# Altium PCB PCB1.PcbDoc
Units mil, origin at the board's own origin, x right, y up, seen from the top; angles counter-clockwise.
Board outline 6000 x 4000 mil, 4 copper layers (Top Layer, Layer 2, Layer 3, Bottom Layer 1), stack 25.09 mil thick; 57 components, 32 nets, 177 pads, 52 vias.
Unrouted connection lines stored in the file: 11.
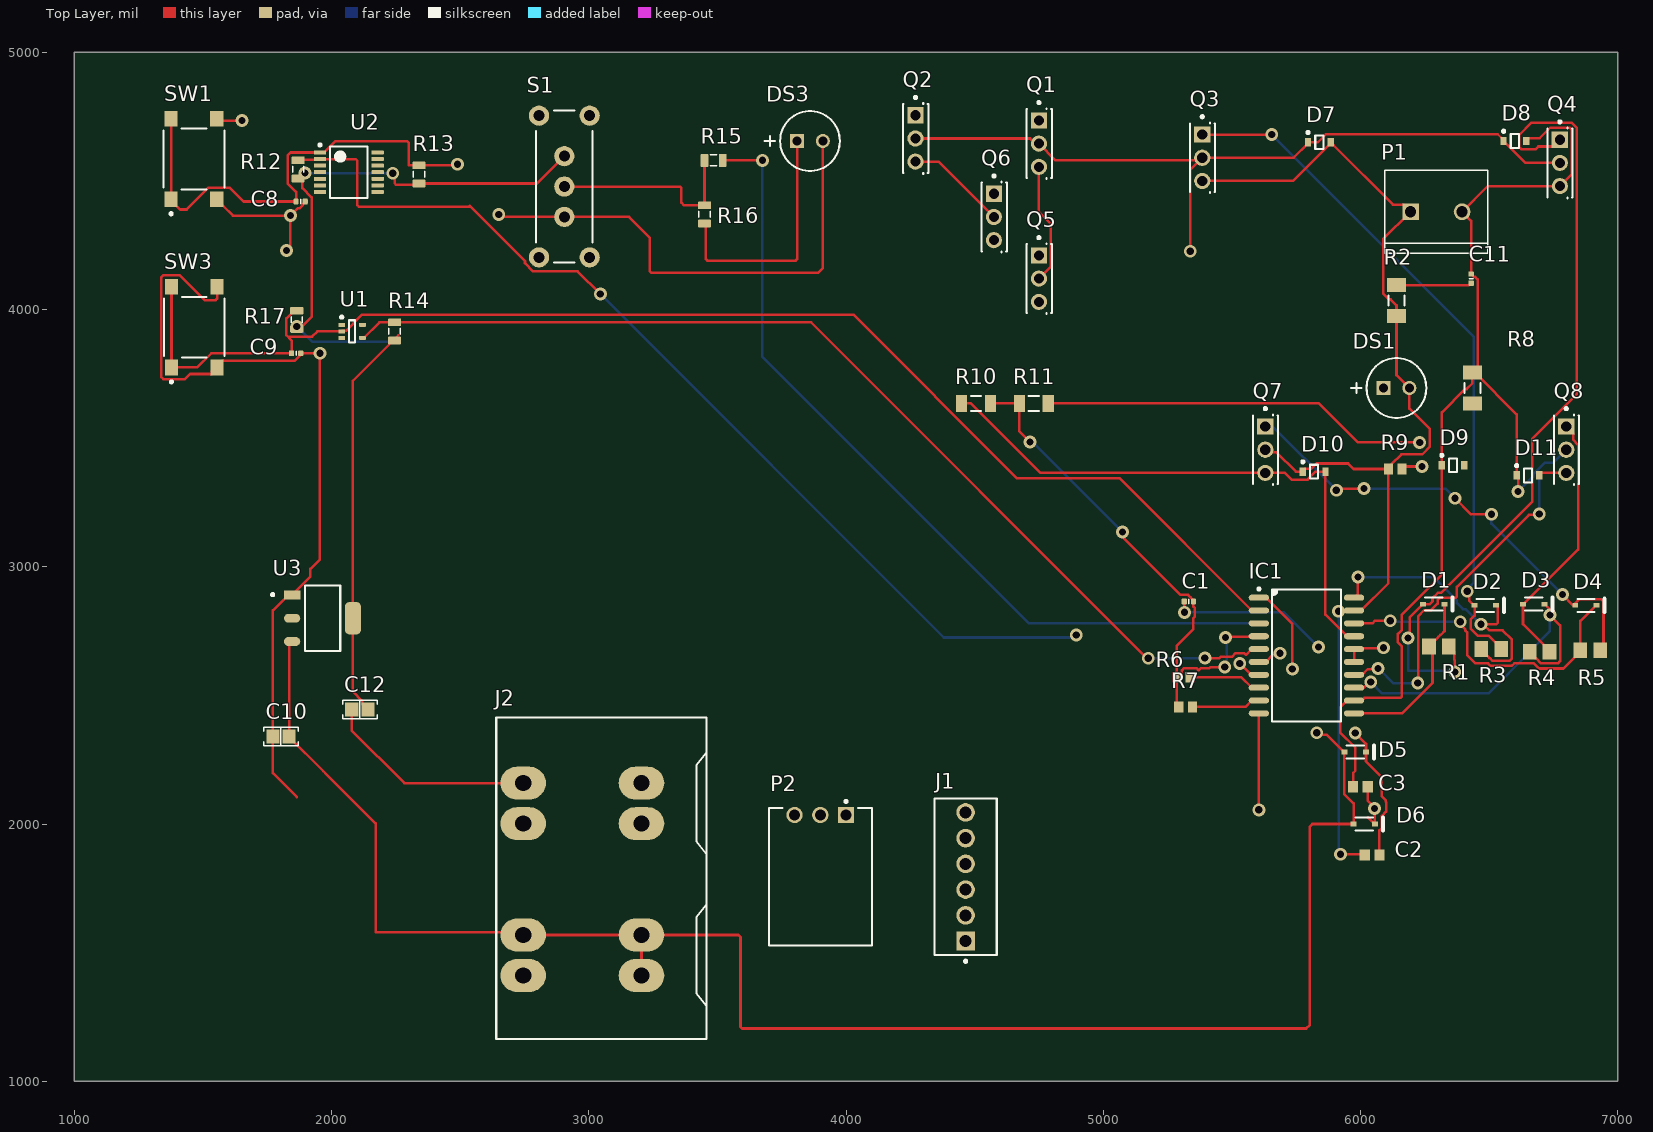
[diagram p0: Top Layer view]
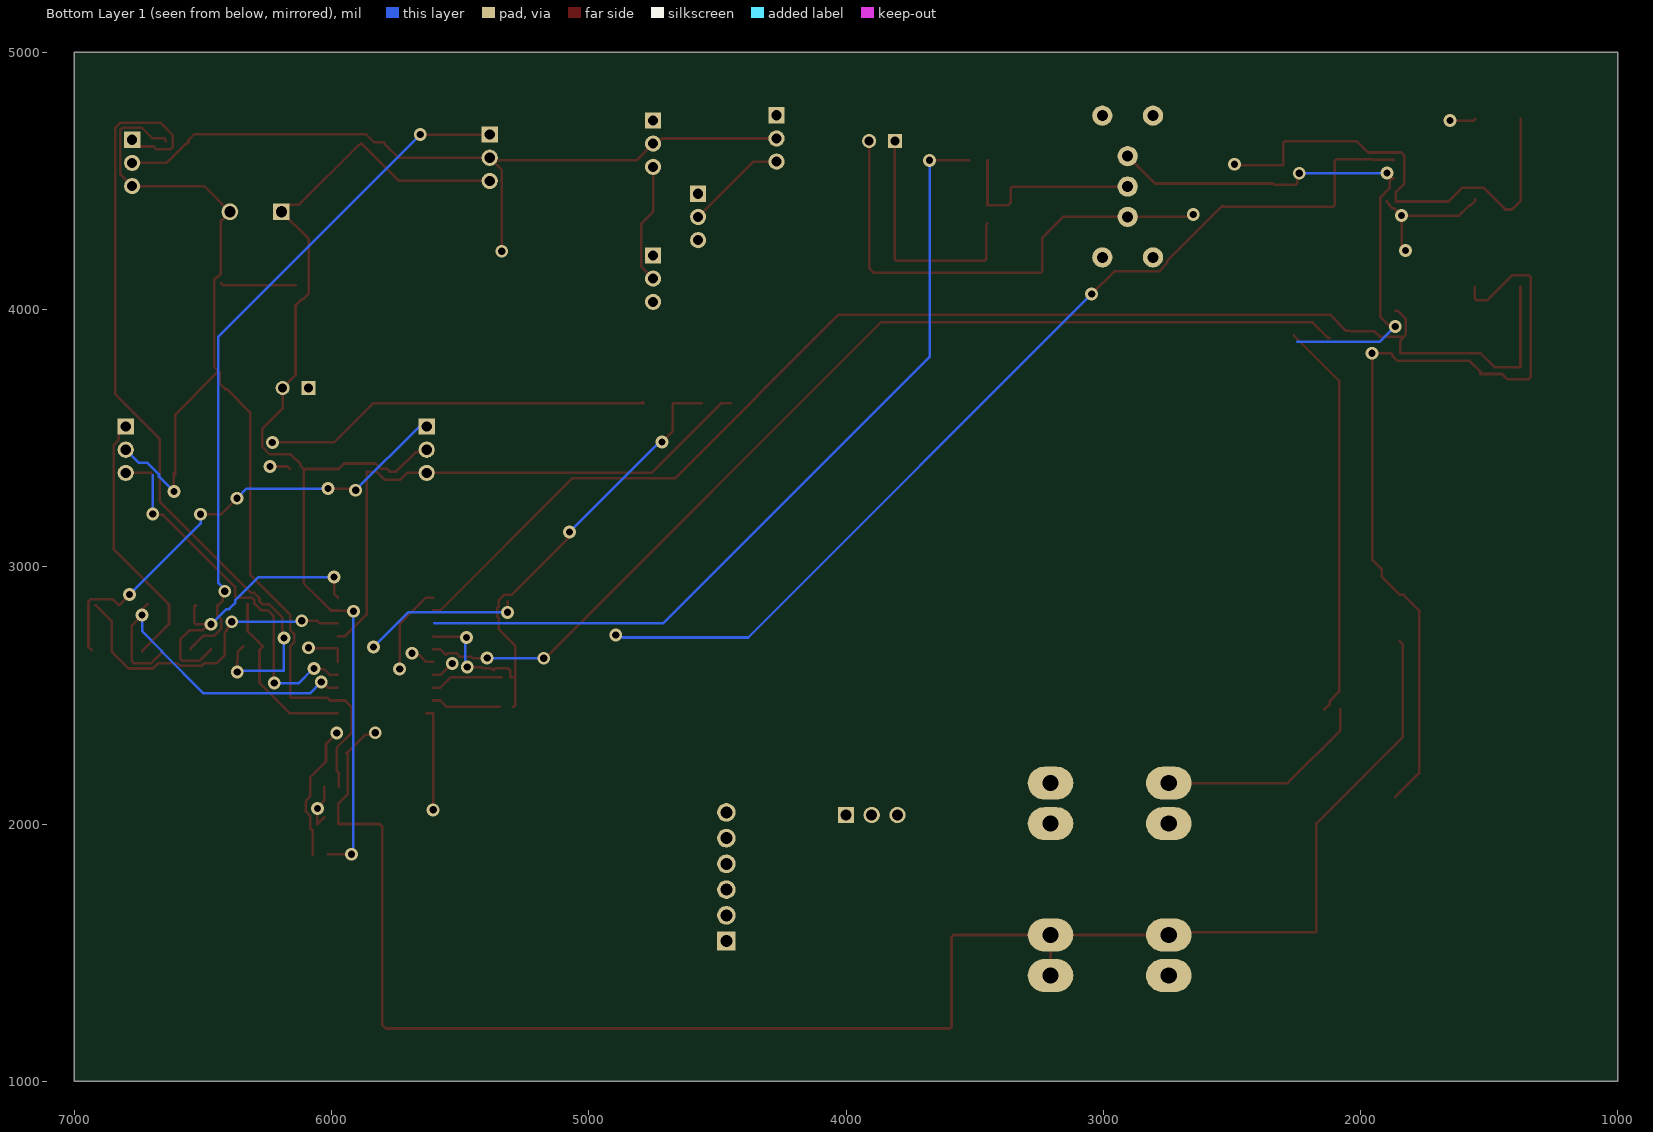
[diagram p1: Bottom Layer 1 view, seen from below]
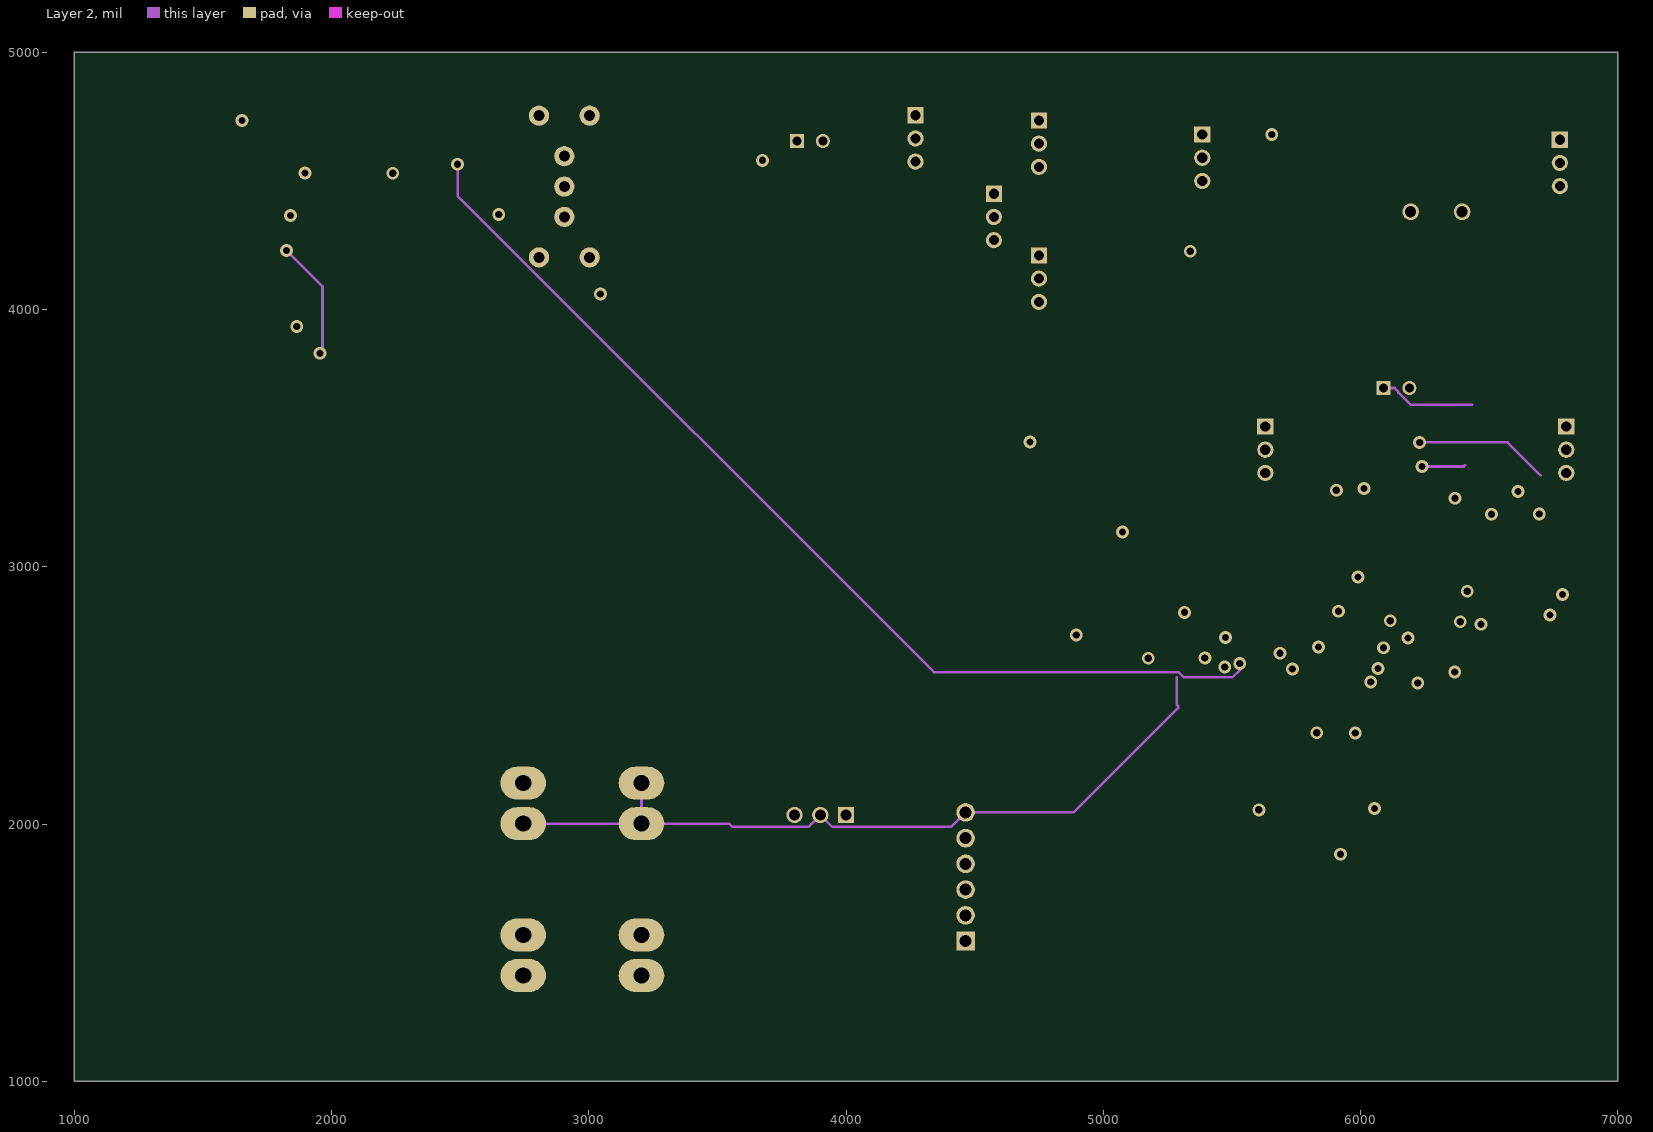
[diagram p2: Layer 2]
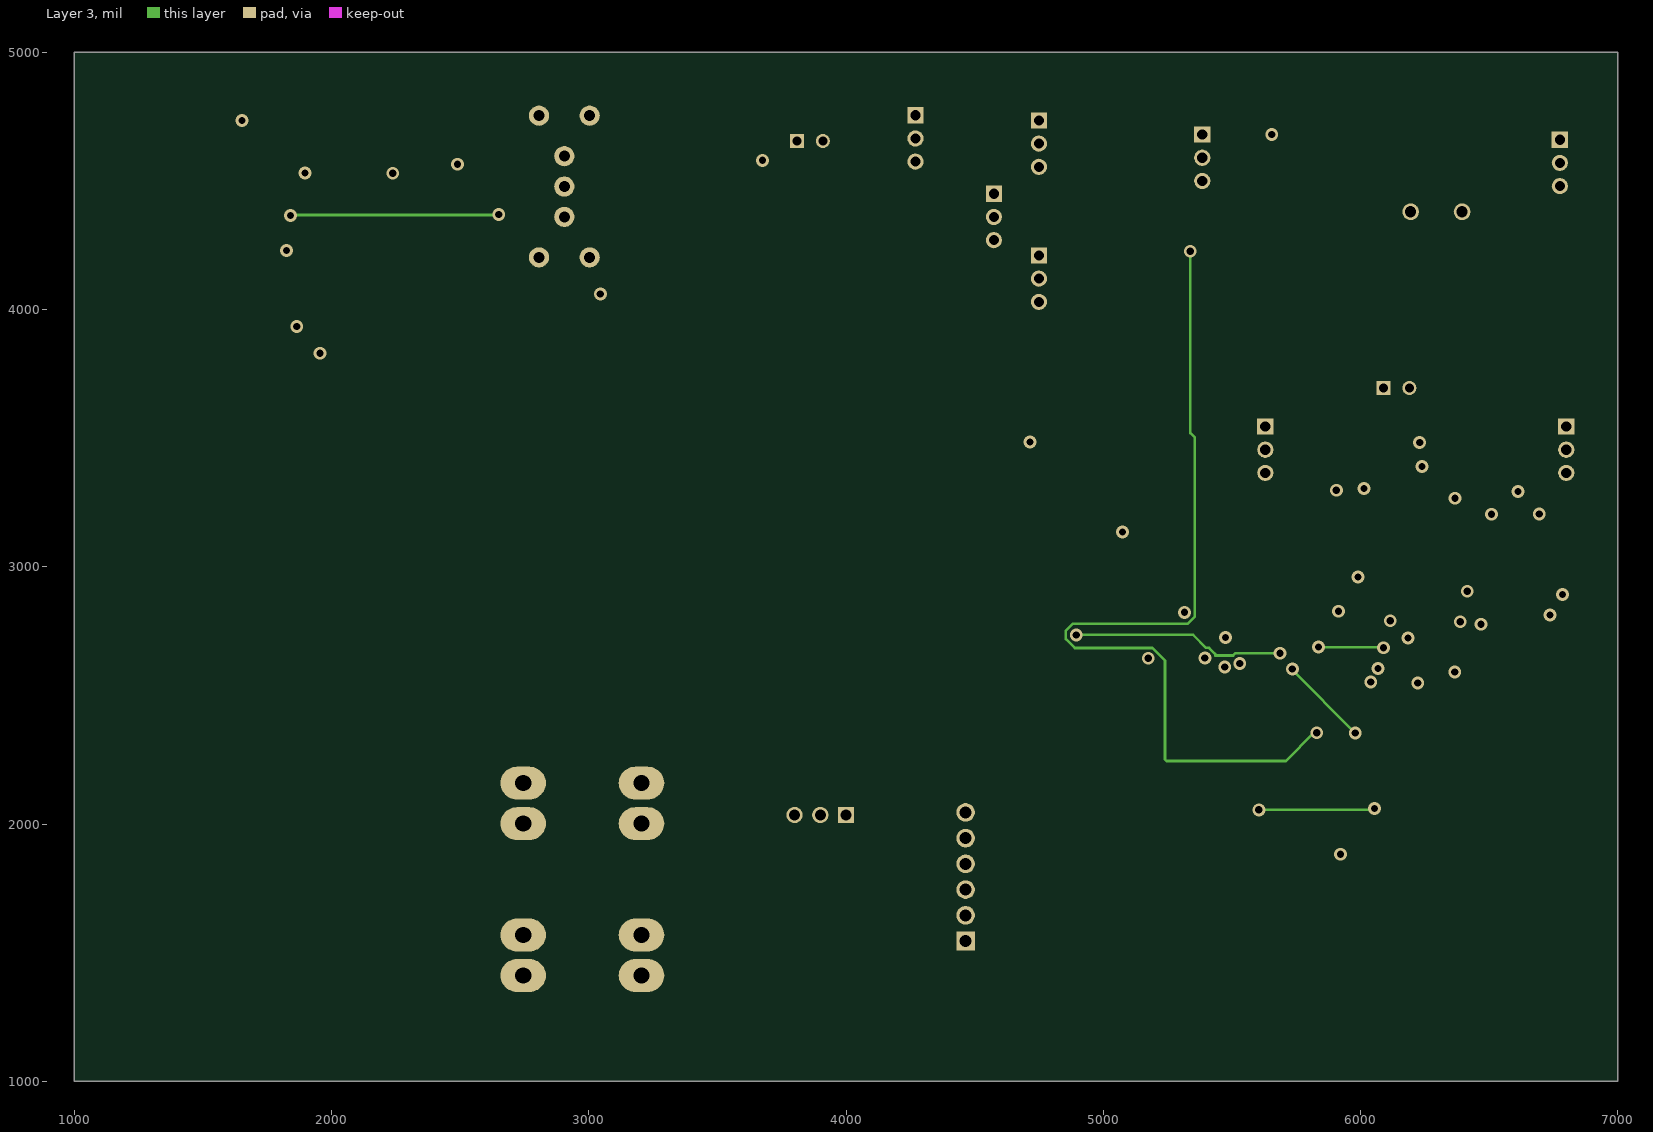
[diagram p3: Layer 3]
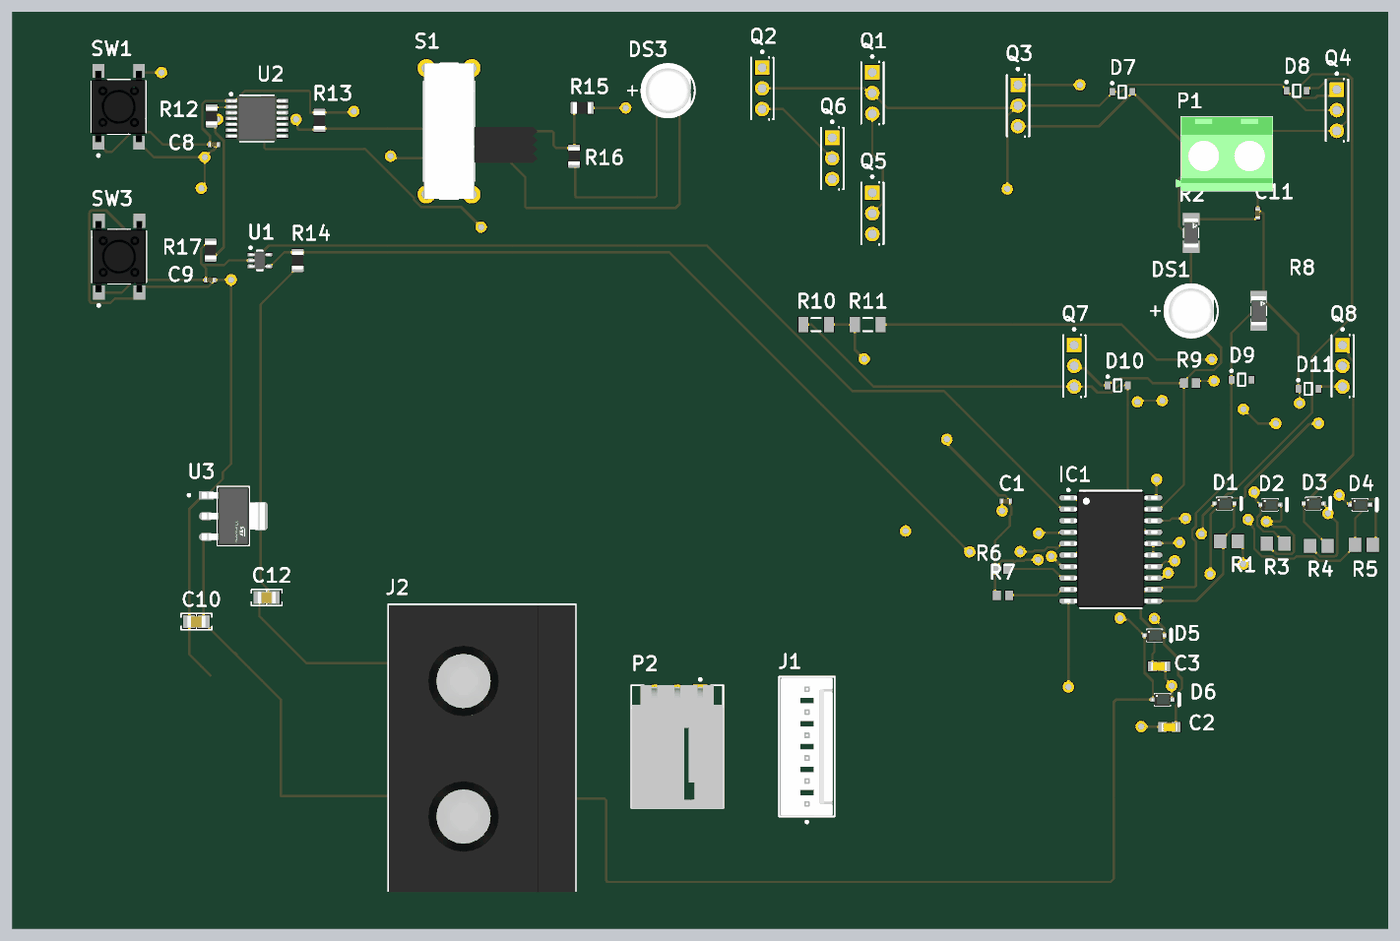
[diagram p4: 3D render of the assembled board from above, using the file's embedded part models]

## Layer stack, top to bottom
Top Solder: solder mask 0.4, Solder Resist, Dk 3.5
Top Layer: signal copper 2.7559
Dielectric 2: prepreg 2.8, PP-006, Dk 4.1
Layer 2: signal copper 0.689
Dielectric 1: dielectric 12.6, FR-4, Dk 4.8
Layer 3: signal copper 0.689
Dielectric 3: prepreg 2.8, PP-006, Dk 4.1
Bottom Layer 1: signal copper 2.7559
Bottom Solder: solder mask 0.4, Solder Resist, Dk 3.5

## Board outline
1000,1000 7000,1000 7000,5000 1000,5000

## Design rules (kind name [scope] priority, off if disabled: settings)
Clearance [All] p1: gap=10 ignorepadtopadclearanceinfootprint=FALSE
PolygonConnect [All] p1: connectstyle=Relief reliefconductorwidth=10 reliefentries=4 polygonreliefangle="90 Angle" airgapwidth=10
RoutingVias [All] p1: holewidth=28 width=50 viastyle="Through Hole" minholewidth=28 minwidth=50 maxholewidth=28 maxwidth=50
SolderMaskExpansion [All] p1: expansion=4 istentingtop=FALSE
Width [All] p1: maxlimit=10 minlimit=10 preferedwidth=10
30 further rules are at their usual default settings.

## Classes and differential pairs
component class U_H-Bridge: C11 D7 D8 D9 D10 D11 DS1 P1 P2 Q1 Q2 Q3 Q4 Q5 Q6 Q7 Q8 R2 R8 R9 R10 R11
component class "U_Gate Driver": C1 C2 C3 D1 D2 D3 D4 D5 D6 IC1 R1 R3 R4 R5 R6 R7
component class U_Control: C8 C9 DS3 J1 R12 R13 R14 R15 R16 R17 S1 SW1 SW3 U1 U2
component class "Motor Driver": C10 C12 J2 U3

## Components (designator, comment, footprint, x,y, rotation, side; value= is the part's Value field where it differs from the comment)
C1 "Capacitor 10µF +/-40% 6.3V 0402" CAPC0402(1005)60_L 5332.72,2865 r0 top value=10µF
C2 "Capacitor 1uF +/- 10% 16V 0603" CAPC1608X90X35ML15T15 6045,1880 r0 top value=1µF
C3 "Capacitor 1uF +/- 10% 16V 0603" CAPC1608X90X35ML15T15 6000,2145 r0 top value=1µF
C8 "Capacitor 100nF +/-20% 10V 0402" CAPC0402(1005)60_L 1880,4420 r0 top value=100nF
C9 "Capacitor 100nF +/-20% 10V 0402" CAPC0402(1005)60_L 1862.72,3830 r0 top value=100nF
C10 "1 µF" "CAP 0805_2012" 1803.5,2340 r0 top
C11 "Capacitor 10µF +/-40% 6.3V 0402" CAPC0402(1005)60_L 6430,4120 r90 top value=10µF
C12 "4.7 µF" "CAP 0805_2012" 2110,2445 r0 top
D1 "1N4148WS-7-F" DIOD-SOD323-2-A_V 6285,2855 r0 top
D2 "1N4148WS-7-F" DIOD-SOD323-2-A_V 6485,2850 r0 top
D3 "1N4148WS-7-F" DIOD-SOD323-2-A_V 6673.46,2855 r0 top
D4 "1N4148WS-7-F" DIOD-SOD323-2-A_V 6876.54,2850 r0 top
D5 "1N4148WS-7-F" DIOD-SOD323-2-A_V 5980,2280 r0 top
D6 "1N4148WS-7-F" DIOD-SOD323-2-A_V 6015,2000 r0 top
D7 "BAT54HT1G" ONSC-SOD-323-2-477-02_V 5840,4650 r0 top
D8 "BAT54HT1G" ONSC-SOD-323-2-477-02_V 6600,4655 r0 top
D9 "BAT54HT1G" ONSC-SOD-323-2-477-02_V 6360,3395 r0 top
D10 "BAT54HT1G" ONSC-SOD-323-2-477-02_V 5820,3370 r0 top
D11 "BAT54HT1G" ONSC-SOD-323-2-477-02_V 6651.1,3355 r0 top
DS1 "WP7113SGD" KING-WP7113SGD_V 6140,3695 r0 top
DS3 "WP7113SGD" KING-WP7113SGD_V 3860,4655 r0 top
IC1 "HIP4081AIBZ" "INTERSIL SOIC-20 WIDE" 5789.96,2655 r0 top
J1 "22-27-2061" FP-22-27-2061-MFG 4465,1795 r90 top
J2 "0399200302" "MOLEX 0399200302" 2975,1785 r90 top
P1 "282837-2" TE_282837-2 6295,4380 r0 top
P2 "70553-0002" MOLX-70553-0002_V 3900,2035 r0 top
Q1 "FQU13N06LTU" FAIR-TO-251-3 4750,4644.84 r0 top
Q2 "FQU13N06LTU" FAIR-TO-251-3 4270,4665 r0 top
Q3 "FQU13N06LTU" FAIR-TO-251-3 5385,4590 r0 top
Q4 "FQU13N06LTU" FAIR-TO-251-3 6775,4570 r0 top
Q5 "FQU13N06LTU" FAIR-TO-251-3 4750,4120 r0 top
Q6 "FQU13N06LTU" FAIR-TO-251-3 4575,4359.84 r0 top
Q7 "FQU13N06LTU" FAIR-TO-251-3 5630,3455 r0 top
Q8 "FQU13N06LTU" FAIR-TO-251-3 6800,3455 r0 top
R1 "ERJ-6ENF20R0V" RESC2013X70X40ML20T20 6305,2690 r0 top
R2 "CRCW12062K20JNEB" FP-CRCW1206-e3-IPC_A 6140,4034.92 r90 top
R3 "ERJ-6ENF20R0V" RESC2013X70X40ML20T20 6508.39,2680 r0 top
R4 "ERJ-6ENF20R0V" RESC2013X70X40ML20T20 6696.61,2670 r0 top
R5 "ERJ-6ENF20R0V" RESC2013X70X40ML20T20 6893.39,2675 r0 top
R6 "CRCW060375K0JNEA" RESC1609X50X30ML10T20 5311.57,2570 r0 top
R7 "CRCW060375K0JNEA" RESC1609X50X30ML10T20 5320,2455 r0 top
R8 "CRCW12062K20JNEB" FP-CRCW1206-e3-IPC_A 6435,3695 r90 top
R9 "CRCW060375K0JNEA" RESC1609X50X30ML10T20 6135,3380 r0 top
R10 "ERJ-8GEY0R00V" RESC3216X70X50NL05T20 4505,3635 r0 top
R11 "ERJ-8GEY0R00V" RESC3216X70X50NL05T20 4730,3635 r0 top
R12 "1KR5J" RESC0805(2012)_L 1870,4545 r90 top value=1k
R13 "1KR5J" RESC0805(2012)_L 2340,4525.43 r90 top value=1k
R14 "1KR5J" RESC0805(2012)_L 2245,3915 r90 top value=1k
R15 "1KR5J" RESC0805(2012)_L 3485,4580 r180 top value=1k
R16 "1KR5J" RESC0805(2012)_L 3450,4370 r90 top value=1k
R17 "1KR5J" RESC0805(2012)_L 1865,3960 r90 top value=1k
S1 "SK-12F17-G 7" "C&K SK-12F17-G 7" 2905,4478.11 r90 top
SW1 "PTS645SM43SMTR92LFS" FP-PTS645SM43SMTR92LFS-MFG 1465,4585 r90 top
SW3 "PTS645SM43SMTR92LFS" FP-PTS645SM43SMTR92LFS-MFG 1466.42,3931.5 r90 top
U1 "SN74LVC1G14DCKR" DCK0005A_L 2080,3915 r0 top
U2 "SN74LVC14APWR" PW0014A_L 2067.2,4533.82 r0 top
U3 "LDL1117S33R" FP-SOT223-0046067-IPC_C 1965,2800 r0 top

## Footprints (in the part's own frame and the unit in brackets; to place one, negate y for a bottom-side part, rotate by r counter-clockwise, add the part's x,y. Pads: shape width x height; smd on the part's side, far side on the other; paste and mask are expansions set on the pad)
"C&K SK-12F17-G 7" [mm] "SWITCH SLIDE SPDT 300MA 30V"
  round 2 hole 1.1: 1(-3,0) 2(0,0) 3(3,0) M(-7,-2.5) M(-7,2.5) M(7,-2.5) M(7,2.5)
  silkscreen extent -7.5,-2.8 7.5,2.8, body extent -7.5,-9.8 7.5,2.8, height 8
"CAP 0805_2012" [mm] "Chip Capacitor, 2-Leads, Body 2.00x1.20mm, IPC Medium Density"
  rect 1.3x1.4 smd: 1(-0.8,0) 2(0.8,0)
  silkscreen extent -1.7,-0.9 1.7,0.9, body extent -1,-0.64 1,0.64, height 1.26
CAPC0402(1005)60_L [mm] "Chip Capacitor, Body 1.0x0.5mm, Height 0.6mm, IPC High Density"
  rrect25% 0.5x0.55 smd: 1(-0.45,0) 2(0.45,0)
  silkscreen extent 0,-0.2 0,0.2, body extent -0.5,-0.25 0.5,0.25, height 0.6
CAPC1608X90X35ML15T15 [mm] "Chip Capacitor, 2-Leads, Body 1.75x0.95mm, IPC Low Density"
  rect 1x1.1 smd: 1(-0.725,0) 2(0.725,0)
  body extent -0.87,-0.48 0.87,0.48, height 0.9
DCK0005A_L [mm] "SOT23, 5-Leads, Body 2.15x1.4mm, Pitch 0.65mm, IPC High Density"
  rrect25% 0.65x0.4 smd: 1(-1.025,0.65) 2(-1.025,0) 3(-1.025,-0.65) 4(1.025,-0.65) 5(1.025,0.65)
  silkscreen extent -1.15,-1.1 0.3,1.52, body extent -1.14,-1 1.14,1, height 0.94
DIOD-SOD323-2-A_V [mm] "SOD-323, 2-Leads, Body 1.7x1.3mm, Lead Span 2.5mm"
  rect 0.59x0.45 smd: 1(-1.055,0) 2(1.055,0)
  silkscreen extent -0.85,-0.65 1.85,0.65, body extent -1.24,-0.7 1.24,0.7, height 1.2
FAIR-TO-251-3 [mm] "FM, 3-Leads, Body 6.8x2.5mm, Pitch 2.29mm"
  rect 1.6x1.6 hole 1: 1(0,2.29)
  round 1.6 hole 1: 2(0,0) 3(0,-2.29)
  silkscreen extent -1.23,-3.49 1.27,4.17, body extent -1.23,-3.4 1.27,3.4, height 9.7
FP-22-27-2061-MFG [mm]
  rect 1.84x1.84 hole 1.19 paste-2539.97 mask+0: 1(-6.35,0)
  round 1.84 hole 1.19 paste-2539.97 mask+0: 2(-3.81,0) 3(-1.27,0) 4(1.27,0) 5(3.81,0) 6(6.35,0)
  silkscreen extent -8.47,-3.08 7.75,3.08, body extent -7.85,-3.18 7.85,3.17, height 0.25
FP-CRCW1206-e3-IPC_A [mil]
  rect 53.39x73.16 smd paste+0 mask+0: 1(-60.08,0) 2(60.08,0)
  silkscreen extent -19,-31 19,31, body extent -106,-56 106,56, height 10
FP-PTS645SM43SMTR92LFS-MFG [mm]
  rect 1.55x1.3 smd paste+0 mask+0: 1(-3.975,2.25) 2(3.975,2.25) 3(-3.975,-2.25) 4(3.975,-2.25)
  silkscreen extent -5.52,-3 3,3, body extent -4.85,-3.1 4.85,3.1, height 0.25
FP-SOT223-0046067-IPC_C [mm]
  rect 1.604x0.88 smd paste+0 mask+0: 1(-3,2.3)
  rrect100% 1.604x0.88 smd paste+0 mask+0: 2(-3,0) 3(-3,-2.3)
  rrect55% 1.604x3.18 smd paste+0 mask+0: 4(3,0)
  silkscreen extent -5.05,-3.25 1.75,3.25, body extent -3.9,-3.35 3.9,3.35, height 0.25
"INTERSIL SOIC-20 WIDE" [mm] "SOIC, 20-Leads, Body 12.80x7.50mm, Pitch 1.27mm, IPC Medium Density"
  oval 2x0.6 smd: 1(-4.7,5.715) 2(-4.7,4.445) 3(-4.7,3.175) 4(-4.7,1.905) 5(-4.7,0.635) 6(-4.7,-0.635) 7(-4.7,-1.905) 8(-4.7,-3.175) 9(-4.7,-4.445) 10(-4.7,-5.715) 11(4.7,-5.715) 12(4.7,-4.445) 13(4.7,-3.175) 14(4.7,-1.905) 15(4.7,-0.635) 16(4.7,0.635) 17(4.7,1.905) 18(4.7,3.175) 19(4.7,4.445) 20(4.7,5.715)
  silkscreen extent -4.82,-6.5 3.4,6.69, body extent -5.16,-6.4 5.16,6.4, height 2.65
KING-WP7113SGD_V [mm] "THD, 2-Leads, Dia 5.9mm, Body Length 8.6mm"
  rect 1.4x1.4 hole 0.889: 1(-1.27,0)
  round 1.4 hole 0.889: 2(1.27,0)
  silkscreen extent -4.47,-2.95 2.95,2.95, body extent -2.95,-2.95 2.5,2.95, height 15.5
"MOLEX 0399200302" [mm]
  oval 3.25x4.5 hole 1.6: 1(-9.5,-5.84) 1(-9.5,5.84) 1(-5.5,-5.84) 1(-5.5,5.84) 2(5.5,-5.84) 2(5.5,5.84) 2(9.5,-5.84) 2(9.5,5.84)
  silkscreen extent -15.75,-12.25 16,8.5, body extent -15.88,-12.19 15.88,8.43, height 35.05
MOLX-70553-0002_V [mm] "Male Header, 2-Leads, Body 13.59x10.17mm, Pitch 2.54mm"
  rect 1.6x1.6 hole 1.09: 1(2.54,0)
  round 1.6 hole 1.09: 2(0,0) 3(-2.54,0)
  silkscreen extent -5.09,-12.89 5.09,1.47, body extent -5.08,-12.89 5.08,0.7, height 6.98
ONSC-SOD-323-2-477-02_V [mm] "SOD, 2-Leads, Body 1.7x1.25mm"
  rect 0.63x0.83 smd: 1(-1.115,0) 2(1.115,0)
  silkscreen extent -1.24,-0.67 0.4,1.09, body extent -0.85,-0.63 0.85,0.63, height 1.06
PW0014A_L [mm] "SOP, 14-Leads, Body 5.1x4.5mm, Pitch 0.65mm, IPC High Density"
  rrect25% 1.2x0.4 smd: 1(-2.85,1.95) 2(-2.85,1.3) 3(-2.85,0.65) 4(-2.85,0) 5(-2.85,-0.65) 6(-2.85,-1.3) 7(-2.85,-1.95) 8(2.85,-1.95) 9(2.85,-1.3) 10(2.85,-0.65) 11(2.85,0) 12(2.85,0.65) 13(2.85,1.3) 14(2.85,1.95)
  silkscreen extent -2.97,-2.55 1.85,2.82, body extent -3.21,-2.5 3.21,2.5, height 1
RESC0805(2012)_L [mm] "Chip Resistor, Body 2.0x1.3mm, IPC High Density"
  rrect25% 0.76x1.3 smd: 1(-0.9,0) 2(0.89,0)
  silkscreen extent -0.3,-0.55 0.3,0.55, body extent -1,-0.62 1,0.63, height 0.6
RESC1609X50X30ML10T20 [mm] "Chip Resistor, 2-Leads, Body 1.55x0.85mm, IPC Low Density"
  rect 0.9x1.05 smd: 1(-0.675,0) 2(0.675,0)
  body extent -0.82,-0.48 0.82,0.48, height 0.5
RESC2013X70X40ML20T20 [mm] "Chip Resistor, 2-Leads, Body 2.00x1.25mm, IPC Low Density"
  rect 1.35x1.55 smd: 1(-0.975,0) 2(0.975,0)
  body extent -1.1,-0.72 1.1,0.72, height 0.7
RESC3216X70X50NL05T20 [mm] "Chip Resistor, 2-Leads, Body 3.20x1.60mm, IPC Medium Density"
  rect 1.1x1.65 smd: 1(-1.425,0) 2(1.425,0)
  silkscreen extent -0.5,-0.72 0.5,0.72, body extent -1.63,-0.82 1.62,0.82, height 0.7
TE_282837-2 [mm]
  rect 1.65x1.65 / inner round 1.65 / far side rect 1.65x1.65 hole 1.1: 1(-2.54,0)
  round 1.65 hole 1.1: 2(2.54,0)
  silkscreen extent -5.08,-4.1 5.08,4.1, body extent -5.68,-4.1 5.08,4.1, height 10

## Part data
C1 C11: library part CMP-001-00074-3, "Chip Capacitor, 10µF +/-40%, 6.3V, 0402, Thickness 0.6 mm", Case/Package=0402, Max Operating Temperature=85°C, Min Operating Temperature=-55°C, Tolerance=10%, Voltage Rating=6.3V, Mounting Technology=SMT, Pins=2
C2 C3: library part CMP-001-00004-6, "Chip Capacitor, 1 uF, +/- 10%, 16 V, 0603 (1608 Metric)", Capacitor Type=Ceramic, Case/Package=0603, Max Operating Temperature=125°C, Min Operating Temperature=-55°C, Tolerance=10%, Voltage Rating=16V, Mounting Technology=SM, Pins=2, RoHS Compliant=True
C8 C9: library part CMP-001-00061-3, "Chip Capacitor, 100nF +/-20%, 10V, 0402, Thickness 0.6 mm", Case/Package=0402, Max Operating Temperature=85°C, Min Operating Temperature=-55°C, Tolerance=20%, Voltage Rating=10V, Mounting Technology=SMT, Pins=2
C10: library part 08055C105KAZ2A, "CAP CER 1UF 50V X7R 0805", Device Package="0805 (2012 Metric)", Manufacturer="KYOCERA AVX", Operating Temperature="-55°C ~ 125°C", Supplier Part Number 1=478-08055C105KAZ2ACT-ND, Temperature Coefficient=X7R, Tolerance=±10%, Voltage - Rated=50V, Applications="Boardflex Sensitive", Capacitance="1 µF", componentlink1description=Datasheet, componentlink1url=https://datasheets.kyocera-avx.com/FlexitermMLCC.pdf, componentlink2description="DigiKey Link", componentlink2url=https://www.digikey.com/en/products/detail/kyocera-avx/08055C105KAZ2A/11568641, Features="Soft Termination", lastupdated="05/03/2022 16:50:45", Lifecycle Status=Active, Minimum Order=1, Mounting Type="Surface Mount, MLCC", Package / Case="0805 (2012 Metric)", Packaging=TapeAndReel, Part Number=08055C105KAZ2A, Part Status=Active, partid=33480, price=0.06, series=-, Size / Dimension="0.079\" L x 0.049\" W (2.01mm x 1.25mm)", Supplier 1=DigiKey, Thickness (Max)="0.055\" (1.40mm)"
C12: library part 885012107009, "CAP CER 4.7UF 10V X5R 0805", Device Package="0805 (2012 Metric)", Manufacturer="Würth Elektronik", Operating Temperature="-55°C ~ 85°C", Supplier Part Number 1=732-7619-1-ND, Temperature Coefficient=X5R, Tolerance=±20%, Voltage - Rated=10V, Applications="General Purpose", Capacitance="4.7 µF", componentlink1description=Datasheet, componentlink1url=https://katalog.we-online.de/pbs/datasheet/885012107009.pdf, componentlink2description="DigiKey Link", componentlink2url=https://www.digikey.com/en/products/detail/würth-elektronik/885012107009/5453474, lastupdated="05/03/2022 16:51:07", Lifecycle Status=Active, Minimum Order=1, Mounting Type="Surface Mount, MLCC", Package / Case="0805 (2012 Metric)", Packaging=TapeAndReel, Part Number=885012107009, Part Status=Active, partid=14493, price=0.09, series=WCAP-CSGP, Size / Dimension="0.079\" L x 0.049\" W (2.00mm x 1.25mm)", Supplier 1=DigiKey, Thickness (Max)="0.053\" (1.35mm)"
D1 D2 D3 D4 D5 D6: library part CMP-004-00002-2, "Fast Switching Diode, 75 V, 0.3 A, -65 to 150 degC, 2-Pin SOD323, RoHS, Tape and Reel", Case/Package=SOD, Forward Current=300mA, Forward Voltage=1.25V, Manufacturer="Diodes Inc", Max Operating Temperature=150°C, Max Surge Current=2A, Min Operating Temperature=-65°C, Package Description="2-Pin Small Outline Diode, Body 1.7 x 1.3 mm", Package Quantity=3000, Package Reference=SOD323-2, Peak Reverse Current=1uA, Datasheet URL=http://www.diodes.com/datasheets/ds30097.pdf, Datasheet Version="Rev. 25-2, 03/2016", Elements=1, Manufacturer URL=http://www.diodes.com/, Mounting Technology=SM, Packaging=TapeandReel, Pins=2, Recovery Time=4ns, RoHS Compliant=True
D7 D8 D9 D10 D11: library part CMP-1055-00462-1, "Schottky Barrier Diode, 2-Pin SOD-323, Pb-Free, Tape and Reel", Manufacturer="On Semiconductor", componentlink1description="Manufacturer URL", componentlink1url=http://www.onsemi.com/, componentlink2description=Datasheet, componentlink2url=http://www.onsemi.cn/pub_link/Collateral/BAT54HT1-D.PDF, ComponentLink3Description="Package Specification", ComponentLink3URL=http://www.onsemi.com/pub_link/Collateral/477-02.PDF.1, Configuration=Single, DatasheetVersion="Rev. 6", IFSM Max (A)=0.6, Mounting Technology="Surface Mount", PackageDescription="2-Pin SOD, Body 1.7 x 1.25 mm", PackageReference=SOD-323-2-477-02, PackageVersion="Rev. H, 03/2007", Packing="Tape and Reel", PartNumber=BAT54HT1G, RoHS=TRUE, trr Max (ns)=5
DS1 DS3: library part CMP-007-00010-2, "LED Green, 62.5 mW, 25 mA, -40 to 85 degC, 2-Pin THD, RoHS, Bulk", Case/Package=Radial, Colour=Green, Forward Voltage=2.2V, Manufacturer=Kingbright, Package Description="2-Pin Through Hole Device, Dia 5.9 mm, Body Length 8.6 mm", Package Quantity=1000, Power=62.5mW, Datasheet URL=http://www.kingbrightusa.com/images/catalog/SPEC/WP7113SGD.pdf, Datasheet Version="Rev. 6B, 01/2015", Illumination Colour=Green, Lens Style=Dome, Luminous Intensity=40mcd, Mounting Technology=TH, Nominal Vf=2.2V, Package Reference=WP7113SGD, Packaging=Bulk, RoHS Compliant=True, Viewing Angle=30degrees
IC1: "IC GATE DRVR HALF-BRIDGE 20SOIC", Part Number=HIP4081AIBZ
J1: library part CMP-04776-000309-1, "CONN HEADER VERT 6POS 2.54MM", Color=Natural, Contact Resistance=10mR, Current Rating=4A, Flammability Rating="UL94 V-0", Housing Color=White, Max Operating Temperature=75°C, Max Voltage Rating (AC)=250V, Min Operating Temperature=0°C, Package Quantity=10000, Connector Type="Male Pin", Contact Material=Brass, Contact Mating Length=0.295inch, Contact Plating=Tin, Contact Type="Male Pin", Depth=5.8mm, Fastening Type=Friction, Gender=Male, Hole Diameter=1.02mm, Housing Material=Nylon, Lead Pitch=2.54mm, Length=15.24mm, Material=Nylon, Max Current Rating=4A, Mount="Through Hole", Number of Contacts=6, Number of Positions=6, Number of Rows=1, Orientation=Straight, Packaging=Bulk, Pitch=2.54mm, Radiation Hardening=No, REACH SVHC="No SVHC", series=KK, Termination=Solder, Voltage Rating=250V, Voltage Rating (AC)=250V, Working Voltage=250V
J2: "TERM BLK 2P SIDE ENTRY 15MM PCB", Color=Black, Current="115 A", Manufacturer=Molex, Supplier Part Number 1=WM20114-ND, Voltage="600 V", componentlink1description=Datasheet, componentlink1url=https://www.molex.com/pdm_docs/sd/399200302_sd.pdf, componentlink2description="DigiKey Link", componentlink2url=https://www.digikey.com/en/products/detail/molex/0399200302/3316297, lastupdated="05/03/2022 16:30:55", Lifecycle Status=Active, Mating Orientation="Horizontal with Board", Minimum Order=1, Mounting Type="Through Hole", Number of Levels=1, Packaging=Bulk, Part Number=0399200302, Part Status=Active, Pitch="0.591\" (15.00mm)", Positions Per Level=2, price=5.90, series="Eurostyle 39920", Supplier 1=DigiKey, Wire Gauge="1-8 AWG", Wire Termination="Screw - Rising Cage Clamp"
P1: library part CMP-004-000000-1, "Ð Ð°Ð·ÑŠÐµÐ¼Ð½Ñ‹Ðµ ÐºÐ»ÐµÐ¼Ð¼Ð½Ñ‹Ðµ ÐºÐ¾Ð»Ð¾Ð´ÐºÐ¸ Ð Ð¾Ð·ÐµÑ‚ÐºÐ° 2 Ð¿Ð¾Ð»Ð¾Ð¶ÐµÐ½Ð¸Ñ 5,08 Ð¼Ð¼ ÐŸÑ€Ð¸Ð¿Ð¾Ð¹ Ð¿Ñ€ÑÐ¼Ð¾Ð¹ Ñ‡ÐµÑ€ÐµÐ· Ð¾Ñ‚Ð²ÐµÑ€ÑÑ‚Ð¸Ðµ 13,5 Ð / ÐºÐ¾Ð½Ñ‚Ð°ÐºÑ‚", Package=None, Availability="In Stock", Check_prices=https://www.snapeda.com/parts/282837-2/TE+Connectivity+AMP+Connectors/view-part/?ref=eda, Component Type=Standard, Design Item ID=282837-2, MF="TE Connectivity", MP=282837-2, Pin Count=2, price=None, Purchase-URL=https://pricing.snapeda.com/search/part/282837-2/?ref=eda, SnapEDA_Link=https://www.snapeda.com/parts/282837-2/TE+Connectivity+AMP+Connectors/view-part/?ref=snap, Source=282837-2.SchLib
P2: library part CMP-2000-05671-1, "Male Header, Pitch 2.54 mm, 1 x 3 Position, Height 6.99 mm, Tail Length 3.3 mm, -40 to 105 degC, RoHS, Rail/Tube", Color=Black, Current, Rating=3A, Flammability Rating=UL94V-0, Manufacturer=Molex, Package Description="Male Header, Pitch 2.54 mm, 1 x 3 Position, Height 6.99 mm, Tail Length 3.3 mm", Temperature, Operating=-40to+105°C, Voltage, Rating=250V, Agency Approvals=CSA,UL, Alternate Mfr Part Number=70553-0002, Angle=RightAngle, Brand/Series=SL™HeaderSeries, Contact Plating=Gold, Datasheet URL=http://www.molex.com/pdm_docs/sd/705530002_sd.pdf, Datasheet Version="Rev. G, 01/2012", Length, Overall="0.535\"", Length, Pin="0.13\"", Manufacturer URL=http://www.molex.com/, Material, Contact=CopperAlloy, Material, Housing=Polyester, Mounting Hole Size="0.043\"", Mounting Technology=ThroughHole, Number of Contacts=3, Number of Rows=1, Package Reference=70553-0002, Pin Spacing="0.1\"", Primary Type=WiretoBoard, Special Features=Shrouded, Strain Relief=LowProfile, Termination=Thru-Hole, Type=PCBPlug
Q1 Q2 Q3 Q4 Q5 Q6 Q7 Q8: library part CMP-013-00024-3, "N-Channel QFET(R) MOSFET, 11 A, 60 V, 115 mOhm, -55 to 150 degC, 3-Pin TO-251, RoHS, Tube", Case/Package=TO-251-3, Input Capacitance=350pF, Manufacturer=Fairchild, Max Operating Temperature=150°C, Min Operating Temperature=-55°C, Package Description="3-Pin Flange Mount, Body 6.575 x 2.3 mm, Pitch 2.29 mm", Package Quantity=70, Power=2.5W, Datasheet URL=https://www.fairchildsemi.com/datasheets/FQ/FQU13N06L.pdf, Datasheet Version="Rev. 1.7, 07/2016", Elements=1, Mounting Technology=TH, Package Reference=TO-251-3, Packaging=Rail/Tube, Pins=3, Rds On Max=115mohm, RoHS Compliant=True, Typical Rise Time=90ns
R1 R3 R4 R5: library part CMP-1013-00316-2, Manufacturer=Panasonic, Part Number=ERJ-6ENF20R0V
R2 R8: library part CMP-02407-002046-1, "RES Thick Film, 2.2kΩ, 5%, 0.25W, 200ppm/°C, 1206", Case Code (Imperial)=1206, Case Code (Metric)=3216, Max Operating Temperature=155°C, Max Power Dissipation=250mW, Min Operating Temperature=-55°C, Package Quantity=10000, Resistance=2.2kR, Temperature Coefficient=200ppm/°C, Tolerance=5%, Voltage Rating=200V, Case/Package=1206, Composition="Thick Film", Contact Plating=Tin, Features="Automotive AEC-Q200", Height=0.024inch, Lead Free="Lead Free", Length=0.126inch, Number of Terminations=2, Packaging="Tape and Reel", Power Rating=250mW, Radiation Hardening=No, Termination=SMD/SMT, Weight=0.000353oz, Width=1.6mm
R6 R7 R9: library part CMP-2000-03572-1, Manufacturer="Vishay Dale", Part Number=CRCW060375K0JNEA
R10 R11: library part CMP-2003-00541-1, Manufacturer=Panasonic, Part Number=ERJ-8GEY0R00V
R12 R13 R14 R15 R16 R17: library part CMP-009-00076-2, "1K 0.125W 5% 0805 (2012 Metric)  SMD", Case/Package=0805, Power=125mW, Tolerance=5%, Mounting Technology=SMT, Pins=2
S1: "SWITCH SLIDE SPDT 300MA 30V", Current Rating (Amps)="300mA (DC)", Manufacturer=C&K, Supplier Part Number 1=CKN10393-ND, Voltage Rating - DC=30V, Actuator Length=7.00mm, Actuator Type=Standard, Circuit=SPDT, componentlink1description=Datasheet, componentlink1url=//media.digikey.com/pdf/Data%20Sheets/C&K/SK-12F17-G.pdf, componentlink2description="DigiKey Link", componentlink2url=http://digikey.com/product-detail/en/c-k/SK-12F17-G-7/CKN10393-ND/2747163, Contact Finish=Silver, Contact Material=Copper, Contact Timing="Not Specified", lastupdated="22-01-2022 09:16:27", Lifecycle Status=Active, Minimum Order=1, Mounting Type="Through Hole, Right Angle", Packaging=Bulk, Part Number="SK-12F17-G 7", Part Status=Active, partid=3, price=0.55, series="SK, COMAX", Supplier 1=DigiKey, Switch Function=On-On, Termination Style="PC Pin"
SW1 SW3: library part CMP-2000-05160-2, "SWITCH TACTILE SPST-NO 0.05A 12V", Case/Package=SMD/SMT, Color=Black, Contact Resistance=100mR, Current Rating=50mA, Max Operating Temperature=60°C, Max Voltage Rating (DC)=12V, Min Operating Temperature=-20°C, Operating Force=160gf, Package Quantity=1, Actuator Length=0.85mm, Actuator Material=Nylon, Actuator Type=Standard, Contact Material=Silver, Contact Plating=Silver, Depth=9mm, Illumination Type=Non-Illuminated, Lead Free="Lead Free", Length=6mm, Max Current Rating=50mA, Mechanical Life=100000Cycles, Mount="Surface Mount", Orientation=Straight, Packaging="Tape and Reel", REACH SVHC="No SVHC", Switch Function=Off-Mom, Termination="Gull Wing", Throw Configuration=SPST, Voltage Rating (DC)=12V
U1: library part CMP-0859-00440-4, "Single Schmitt-Trigger Inverter, DCK0005A, LARGE T&R", F @ Nom Voltage(Max)(Mhz)=150, Generic Part Number=SN74LVC1G14, ICC @ Nom Voltage(Max)(mA)=0.01, Manufacturer="Texas Instruments", Operating Temperature Range(C)="-40 to 125,-40 to 85", Rating=Catalog, tpd @ Nom Voltage(Max)(ns)=11,6.5,5.5,5, Voltage(Nom)(V)=1.8,2.5,3.3,5, 3-State Output=No, Bits(#)=1, DatasheetVersion=SCES218W, Input Type=CMOS/TTL, Logic=Inverting, Output Drive (IOL/IOH)(Max)(mA)=32/-32, Output Type=CMOS, PackageReference=DCK0005A, Schmitt Trigger=Yes, Sub-Family="Inverting Buffer/Driver", Technology Family=LVC, VCC(Max)(V)=5.5, VCC(Min)(V)=1.65
U2: library part CMP-1615-01052-3, "Hex Schmitt-Trigger Inverter, PW0014A, LARGE T&R", F @ Nom Voltage(Max)(Mhz)=100, Generic Part Number=SN74LVC14A, ICC @ Nom Voltage(Max)(mA)=0.01, Manufacturer="Texas Instruments", Operating Temperature Range(C)="-40 to 125", Rating=Catalog, tpd @ Nom Voltage(Max)(ns)=11,7.8,7.5,6.4, Voltage(Nom)(V)=1.8,2.5,2.7,3.3, Bits(#)=6, Code_JEDEC=MO-153, DatasheetVersion=SCAS285AA, Input Type=CMOS,TTL, Output Drive (IOL/IOH)(Max)(mA)=-24/24, Output Type=CMOS, PackageReference=PW0014A, Schmitt Trigger=Yes, Technology Family=LVC, VCC(Max)(V)=3.6, VCC(Min)(V)=2
U3: library part CMP-12153-000006-1, "IC REG LINEAR 3.3V 1.2A SOT223", Dropout Voltage=350mV, Manufacturer=STMicroelectronics, Max Junction Temp=+125°C, Max Supply Voltage=18V, Min Supply Voltage=2.6V, Nominal Supply Current=250uA, Output Current=2A, Output Voltage=3.3V, Package=SOT223-0046067, Temperature="-40°C to +125°C", Temperature Range Low=-40°C, Accuracy Percentage=2%, Automotive=No, Category=IC, componentlink2description=Datasheet, componentlink2url=https://www.st.com/resource/en/datasheet/ldl1117.pdf, Device Class L1="Integrated Circuits (ICs)", Device Class L2="Power Management ICs", Device Class L3="Voltage Regulators - Linear", Digikey Description="IC REG LINEAR 3.3V 1.2A SOT223", Height=1.9mm, Ipc Land Pattern Name=SOT230P700X190-4, Lead Free=Yes, Manufacturer Part Number=LDL1117S33R, Mouser Description="LDL1117 Series 1.2 A 3.3 V High PSRR LDO Linear Voltage Regulator-SOT-223", Number Of Outputs=1, Octopart=https://octopart.com/ldl1117s33r-stmicroelectronics-81876163, Output Type=Fixed, RoHS=TRUE, Standoff Height=0.02mm, Temperature Range High=+125°C

## Via types
v1: diameter 50, hole 28, Top Layer to Bottom Layer 1, 52 vias

## Nets (pads, with @x,y where several pads share a name; then routed paths per layer and width w, separated by ;. In a path a pad name is that pad's centre, name@x,y a point inside that pad or via, vN(x,y) a via of type N, cw(c..) or ccw(c..) an arc to the next point about the centre after c; other vN are vias at no path point)
3V3: C12.2 R12.1 R13.1 R14.1 R17.1 S1.3 U3.4 | length 3727.7
  Top Layer w10: v1(1865,3934.61) 1865,3934.53 1874.96,3924.57 1875.63,3924.57 1922.56,3971.5 1922.56,4436.02 1886.85,4471.73 1886.85,4499.61 1876.89,4509.57 R12.1@1871.86,4509.57 ; R12.1 1875.6,4509.57 v1(1896.38,4530.34) ; C12.2 2119.09,2467.4 2119.09,2478.77 2083.11,2514.76 U3.4 2083.11,3723.11 2260,3900 ; v1(2238.03,4530) 2245,4523.03 2245,4490.86 2250.86,4485 2335,4485 R13.1 2798.78,4490 S1.3
  Bottom Layer 1 w10: v1(1865,3934.61) 1924.61,3875 2245,3875 ; v1(1896.38,4530.34) 2234.66,4530.34 2235,4530 v1(2238.03,4530)
12V: C10.2 D5.1 D6.1 D7.1 D8.1 J2.1 Q1.2 Q2.2 Q3.2 Q4.2 U3.3 | length 13210.6
  Top Layer w10: U3.3 1846.38,2709.45 1835,2698.07 C10.2 1835,2338.03 1968.03,2205 1968.28,2205 1980,2193.28 1980,2193.03 2171.17,2001.86 2171.17,1579.77 2733.77,1579.77 2745.08,1568.46 J2.1@3204.92,1568.46 ; J2.1@3204.92,1410.98 J2.1@3204.92,1568.46 ; Q2.2@4300,4664.84 4715.66,4664.84 4735.66,4644.84 Q1.2 4814.84,4580 Q3.2@5375,4580 ; v1(5338.5,4226.5) 5338.5,4543.5 Q3.2@5375,4580 ; v1(5830,2355) 5837.65,2347.35 5868.36,2347.35 D5.1@5937.09,2278.62 ; D5.1@5942.32,2276.14 5936.77,2276.14 5936.77,2117.13 5973.46,2080.44 D6.1 5813.38,2000 5802.95,1989.58 5802.95,1218.81 5789.14,1205 3595.86,1205 3590,1210.86 3590,1560 3581.54,1568.46 J2.1@3204.92,1568.46 ; Q4.2 6641.1,4570 6567.44,4643.66 6563.5,4643.66 6556.1,4651.06 D8.1 6556.1,4658.94 6533.7,4681.34 5865.28,4681.34 5833.94,4650 D7.1 5796.1,4646.06 5740.04,4590 Q3.2 Q3.2@5375,4580
  Layer 3 w10: v1(5338.5,4226.5) 5338.5,3519.83 5356.17,3502.16 5356.17,2806.32 5328.79,2778.95 4882.38,2778.95 4855,2751.57 4855,2718.43 4889.34,2684.09 5191.57,2684.09 5240,2635.66 5240,2250.86 5245.86,2245 5710,2245 5820,2355 v1(5830,2355)
+12: C1.1 IC1.15 IC1.16 | length 1054.3
  Top Layer w10: C1.1 5315,2824.06 v1(5316.17,2822.89) ; IC1.15 IC1.16 5977.5,2682.5 6087.5,2682.5 v1(6090,2685)
  Layer 3 w10: v1(5836.73,2687.51) 6092.51,2687.51 v1(6090,2685)
  Bottom Layer 1 w10: v1(5316.17,2822.89) 5702.11,2822.89 5840,2685 5839.24,2685 v1(5836.73,2687.51)
BST_A: C3.2 D6.2 IC1.10 | length 1049.6
  Top Layer w10: v1(5604.92,2055.08) IC1.10 IC1.10@5632.48,2430 ; 6028.54,2025.24 6053.78,2000 D6.2 6055.73,2000.81 6055.73,2059.27 v1(6054.92,2060.08) 6054.92,2063.89 6028.54,2090.27 C3.2
  Layer 3 w10: v1(5604.92,2055.08) 6049.92,2055.08 v1(6054.92,2060.08)
BST_B: C2.2 D5.2 IC1.1 | length 1232
  Top Layer w10: IC1.1 5632.48,2880 5735.09,2777.39 v1(5735.09,2602.26) ; v1(5979.54,2353.42) 6021.54,2311.43 D5.2 6021.54,2242.84 6083.23,2181.15 6083.23,2107.72 6098.86,2092.09 6098.86,2086.19 6099.78,2085.27 6099.78,2048.37 6083.23,2031.82 6083.23,1985.01 6073.54,1975.32 C2.2
  Layer 3 w10: v1(5735.09,2602.26) 5735.09,2597.87 v1(5979.54,2353.42)
EN: IC1.3 R15.1 | length 3272.8
  Top Layer w10: R15.1 v1(3675,4580)
  Bottom Layer 1 w10: v1(3675,4580) 3675,3815.86 4710.86,2780 5600,2780
GATEH_A: D1.1 Q4.1 R1.2 | length 3177.2
  Top Layer w10: v1(6185.04,2722.56) 6191.12,2722.56 6191.12,2802.66 D1.1 6270.08,2855 6279.92,2864.84 6279.92,2878.36 6300.42,2898.86 6313.94,2898.86 6667.6,3252.52 6667.6,3496.96 6841.5,3670.86 6841.5,4706.15 6820.99,4726.65 6665.6,4726.65 6616.5,4677.55 6616.5,4632.45 6625.28,4623.66 6681.89,4623.66 6691.89,4633.66 6748.5,4633.66 Q4.1 ; R1.2 6364.96,2668.43 6364.96,2637.82 6366.27,2636.52 v1(6366.27,2591.37)
  Bottom Layer 1 w10: v1(6185.04,2722.56) 6185.04,2595.04 6185,2595 6362.64,2595 v1(6366.27,2591.37)
GATEH_B: D2.1 Q3.1 R3.2 | length 2699.6
  Top Layer w10: Q3.1 5654.84,4680.16 v1(5655,4680) ; v1(6415,2905) 6422.65,2897.35 6422.65,2868.06 6440.71,2850 D2.1 6443.46,2810.59 6428.14,2795.27 6428.14,2759.72 6455.25,2732.62 6498.09,2732.62 6546.77,2683.94 R3.2
  Bottom Layer 1 w10: v1(5655,4680) 6440,3895 6440,2936.57 6415,2911.57 v1(6415,2905)
GATEL_A: D3.1 Q8.1 R4.2 | length 1027.6
  Top Layer w10: R4.2 6735,2673.94 6631.93,2777.01 D3.1 6634.69,2855 6846.5,3066.81 6846.5,3474.26 6826.5,3494.26 6826.5,3518.66 Q8.1
GATEL_B: D4.1 Q7.1 R5.2 | length 1844.6
  Top Layer w10: v1(5906.12,3297.54) 5912.36,3303.78 v1(6014.26,3303.78) ; v1(6367.82,3266.34) 6430.21,3203.95 v1(6509.24,3203.95) ; v1(6785.1,2891.81) 6826.91,2850 6850.77,2873.86 6935.9,2873.86 6944.69,2865.07 6944.69,2687.91 R5.2
  Bottom Layer 1 w10: Q7.1@5625.69,3550.8 5652.86,3550.8 v1(5906.12,3297.54) ; v1(6014.26,3303.78) 6330.38,3303.78 v1(6367.82,3266.34) ; v1(6509.24,3203.95) 6509.24,3167.67 v1(6785.1,2891.81)
GND: C1.2 C8.2 C9.2 C10.1 C12.1 DS3.2 IC1.4 J1.6 J2.2 P2.2 R6.1 R7.1 R10.2 R11.1 S1.1 SW1.3 SW1.4 SW3.3 SW3.4 U3.1 | length 13073
  Top Layer w10: SW1.3 1553.58,4423.58 1574.17,4402.99 1579.09,4402.99 1617.09,4365 v1(1840,4365) ; SW1.4 1560.44,4734.64 v1(1651.43,4734.64) ; SW3.4 1555,4042.48 1549.14,4036.62 1506.52,4036.62 1409.64,4133.5 1346.03,4133.5 1337.24,4124.72 1337.24,3738.28 1346.03,3729.49 1430.22,3729.49 1450.22,3749.49 1534.41,3749.49 1534.41,3759.33 1575.59,3800.51 1855.95,3800.51 1875.59,3820.15 1875.59,3825.16 C9.2 v1(1955,3830) 1955,3028.58 1917.83,2991.41 1917.83,2961.49 U3.1 1832.63,2890.55 1772.01,2829.93 C10.1 1772.01,2197.99 1865,2105 ; v1(1825,4230) 1840,4245 v1(1840,4365) ; C8.2 1897.72,4419.02 1887.13,4408.43 1887.13,4404.4 1876.01,4393.28 1868.28,4393.28 v1(1840,4365) ; C12.1 2078.5,2363.63 2283.12,2159.02 J2.2@2745.08,2159.02 ; v1(2650,4370) 2660,4360 S1.1 3156.41,4360 3236.8,4279.61 3236.8,4149.05 3242.66,4143.2 3892.34,4143.2 3910,4160.86 DS3.2 ; R10.2 R11.1 4673.9,3526.1 v1(4715,3485) ; v1(5075,3135) 5075,3116.21 5300.39,2890.83 5329.61,2890.83 5339.84,2880.6 5339.84,2880.16 5350.43,2869.57 C1.2 5350.43,2845.2 5356.17,2839.46 5356.17,2806.32 5350.43,2800.58 5350.43,2757.56 5285,2692.13 R6.1 ; R7.1 5285,2463.43 R6.1 ; v1(5472.65,2610) 5416.57,2610 5411.57,2605 5378.98,2605 5370.87,2596.88 5362.08,2605.67 5314.22,2605.67 5305.43,2596.88 5305.43,2570.43 5305,2570 R6.1 ; v1(5475,2725) 5477.5,2727.5 5602.42,2727.5 IC1.4
  Layer 2 w10: v1(1825,4230) 1965,4090 1965,3830 v1(1955,3830) ; J2.2@2745.08,2001.54 J2.2@3204.92,2001.54 ; J2.2@3204.92,2159.02 J2.2@3204.92,2001.54 ; 5285,2570 5285,2465 5290.86,2459.14 5290.86,2450.86 4885,2045 J1.6 4408.5,1988.5 3946.5,1988.5 P2.2 3853.5,1988.5 3558.15,1988.5 3545.12,2001.54 J2.2@3204.92,2001.54
  Layer 3 w10: v1(1840,4365) 1842.5,4367.5 2647.5,4367.5 v1(2650,4370)
  Bottom Layer 1 w10: v1(4715,3485) 4725,3485 v1(5075,3135) ; v1(5472.65,2610) 5475,2610 5480,2615 5480,2720 v1(5475,2725)
HIGHIN_A: C8.1 IC1.7 R13.2 SW1.1 SW1.2 U2.1 | length 5925.5
  Top Layer w10: SW1.2 1376.42,4423.58 1411.15,4388.85 1436.61,4388.85 1521.78,4474.02 1604.17,4474.02 1658.19,4420 C8.1 1862.28,4457.71 1829.41,4490.58 1829.41,4599.02 1840.98,4610.59 U2.1 1970.75,4610.59 2014.57,4654.41 2293.55,4654.41 2299.41,4648.55 2299.41,4560.47 R13.2 2485.47,4560.47 v1(2490,4565) ; v1(5530.88,2624.48) 5531.88,2624.48 5576.36,2580 IC1.7
  Layer 2 w10: v1(2490,4565) 2490,4442.2 4342.2,2590 5293.28,2590 5313.28,2570 5501.57,2570 5535,2603.43 5535,2620 5539.48,2624.48 v1(5530.88,2624.48)
HIGHIN_B: C9.1 IC1.2 R17.2 SW3.1 SW3.2 U1.2 | length 5281.2
  Top Layer w10: SW3.2 SW3.1 1477.68,3775 1532.68,3830 C9.1 1845,3879.39 1824.41,3899.98 1824.41,3965.08 1854.37,3995.04 R17.2 ; 1835.39,3894.61 1924.78,3894.61 1945.17,3915 U1.2 2042.36,3917.72 2057.5,3917.72 2085.77,3945.98 2085.77,3946.73 2119.03,3980 4028.55,3980 4663.71,3344.84 5062.52,3344.84 5577.36,2830 IC1.2
HIGHOUT_A: D1.2 IC1.11 R1.1 | length 691.8
  Top Layer w10: IC1.11 6161.42,2430 6280,2548.58 6280,2676.61 R1.1 6301.81,2725.2 6301.81,2726.72 6310.6,2735.51 6312.13,2735.51 6326.54,2749.92 D1.2
HIGHOUT_B: D2.2 IC1.20 R3.1 | length 1141.4
  Top Layer w10: IC1.20 5990,2895 v1(5990,2960) ; v1(6468.14,2776.29) v1@6477.37,2776.29 ; R3.1 6470,2676.06 6501.57,2644.49 6503.98,2644.49 6513.98,2634.49 6579.56,2634.49 6588.35,2643.28 6588.35,2716.72 6552.46,2752.62 6501.04,2752.62 v1@6477.37,2776.29 ; D2.2 6529.29,2850 6533.15,2846.14 6533.15,2840.82 6533.68,2840.28 6533.68,2782.15 6527.83,2776.29 v1@6477.37,2776.29
  Bottom Layer 1 w10: v1(5990,2960) 6283.78,2960 6375,2868.78 6375,2858.43 6398.43,2835 6408.78,2835 6460,2783.78 6460,2780 6464.43,2780 v1(6468.14,2776.29)
"HIGHSRC A": Q2.3 Q6.2 | length 394.1
  Top Layer w10: Q2.3 4360,4574.84 Q6.2
"HIGHSRC B": Q1.3 Q5.2 | length 473.2
  Top Layer w10: Q5.2 4796.5,4166.5 4796.5,4333.15 4750,4379.64 Q1.3
HIGHSRC_A: C3.1 C11.2 D8.2 D9.1 D11.1 IC1.12 P1.2 Q4.3 Q8.2 R8.2 | length 4324.6
  Top Layer w10: C3.1 5971.46,2198.56 5979.95,2207.06 5979.95,2296.44 5920.63,2355.77 5920.63,2453.19 5947.44,2480 6005.23,2480 6015.23,2490 6154.78,2490 6160.63,2495.86 6160.63,2690.4 6145.04,2705.99 6145.04,2739.13 6160.63,2754.72 6160.63,2813.86 6316.1,2969.32 D9.1 6316.1,3600.51 6406.2,3690.61 6412.22,3690.61 6435,3713.39 R8.2 ; D11.1 D11.1@6607.2,3358.94 ; v1(6612.64,3292.63) 6612.64,3364.37 D11.1@6607.2,3358.94 ; D8.2 6643.9,4658.94 6651.3,4666.34 6696.98,4666.34 6737.29,4706.65 6812.71,4706.65 6821.5,4697.87 6821.5,4526.34 Q4.3 6494.84,4479.84 P1.2 6430,4345 C11.2 6430.98,4137.72 6441.57,4127.13 6445.6,4127.13 6455.83,4116.9 6455.83,3775.91 R8.2 ; R8.2 6444.89,3755.08 6607.2,3592.76 D11.1@6607.2,3358.94
  Bottom Layer 1 w10: v1(6612.64,3292.63) 6670.75,3350.73 6670.75,3359.03 6715.79,3404.07 6749.07,3404.07 Q8.2
HIGHSRC_B: C2.1 D7.2 D10.1 DS1.2 IC1.19 P1.1 Q3.3 Q7.2 R2.1 R9.1 | length 4482
  Top Layer w10: Q3.3 5737.68,4499.84 5883.9,4646.06 5891.3,4638.66 5895.24,4638.66 6126.42,4407.48 6167.52,4407.48 P1.1 6088.42,4273.42 6088.42,4062.09 6111.2,4039.31 6117.22,4039.31 6140,4016.53 R2.1 6140,3745 DS1.2 6190,3614.84 6270.12,3534.72 6270.12,3466.77 6240.17,3436.83 6158.8,3436.83 6121.14,3399.17 6121.14,3392.72 R9.1 ; Q7.2 5640.14,3444.86 5673.84,3444.86 5748.7,3370 D10.1 5776.1,3373.94 5783.5,3381.34 5809.11,3381.34 5829.11,3401.34 5951.74,3401.34 5973.08,3380 R9.1 ; v1(5914.07,2826.98) 5915.58,2828.49 5973.49,2828.49 IC1.19 6002.56,2830 6108.43,2935.87 R9.1 ; v1(5922.5,1882.5) C2.1@6013.96,1882.5
  Bottom Layer 1 w10: v1(5914.07,2826.98) 5915,2826.05 5915,1885 5917.5,1882.5 v1(5922.5,1882.5)
LEDPWR: DS3.1 R16.1 | length 959.8
  Top Layer w10: R16.1 3455,4329.57 3455,4195.86 3460.86,4190 3804.14,4190 3810,4195.86 DS3.1
LOWIN_A: IC1.6 R12.2 U2.2 | length 4838.4
  Top Layer w10: R12.2 1872.48,4582.52 1952.52,4582.52 U2.2 2094.14,4585 2100,4579.14 2100,4405.86 2105.86,4400 2535,4400 2537.5,4402.5 2752.2,4187.8 2752.2,4180 2784.05,4148.15 2956.85,4148.15 v1(3045,4060) ; IC1.6 5632.48,2630 5658.72,2656.23 5679.02,2656.23 v1(5686.67,2663.89)
  Layer 3 w10: v1(4895,2735) 5350,2735 5400,2685 5411.57,2685 5435,2661.57 5435,2655 5504.83,2655 5514.31,2664.48 5686.08,2664.48 v1(5686.67,2663.89)
  Bottom Layer 1 w10: v1(3045,4060) 4380,2725 4870,2725 4880,2735 v1(4895,2735)
LOWIN_B: IC1.5 R14.2 U1.4 | length 4071.5
  Top Layer w10: U1.4 2125.28,3889.41 2185.91,3950.04 R14.2 3864.96,3950.04 5170.91,2644.09 v1(5175,2644.09) ; v1(5395,2645) 5451.08,2645 5456.08,2650 5468.43,2650 5499.83,2650 5514.31,2664.48 5547.45,2664.48 5554.64,2657.28 5577.36,2680 IC1.5
  Bottom Layer 1 w10: v1(5175,2644.09) 5394.09,2644.09 v1(5395,2645)
LOWOUT_A: D3.2 IC1.13 R4.1 | length 1345.4
  Top Layer w10: IC1.13 6013.26,2530 6037.34,2554.07 6038.04,2554.07 v1(6040.09,2552.02) ; R4.1 6658.23,2666.06 6679.8,2644.49 6682.21,2644.49 6702.21,2624.49 6767.79,2624.49 6776.57,2633.28 6776.57,2772.06 v1(6736.6,2812.03) 6736.6,2833.4 D3.2
  Bottom Layer 1 w10: v1(6040.09,2552.02) 6084.29,2507.82 6497.82,2507.82 6660,2670 6660,2673.19 6736.6,2749.79 v1(6736.6,2812.03)
LOWOUT_B: D4.2 IC1.18 R5.1 | length 1263.8
  Top Layer w10: IC1.18 6046.64,2780 6056.88,2790.24 v1(6115.76,2790.24) ; v1(6388.14,2786.06) 6388.14,2775.23 6408.14,2755.23 6408.14,2751.44 6415,2744.58 6415,2656.7 6447.21,2624.49 6495.7,2624.49 6505.7,2614.49 6587.84,2614.49 6597.84,2624.49 6673.93,2624.49 6693.93,2604.49 6788.43,2604.49 6855,2671.06 6855,2789.69 6915.31,2850 D4.2
  Bottom Layer 1 w10: v1(6115.76,2790.24) 6119.94,2786.06 v1(6388.14,2786.06)
LOWSRC_A: D11.2 IC1.14 Q8.3 R11.2 | length 3504.8
  Top Layer w10: R11.2@4791.1,3640 R11.2 5838.04,3635 5989.7,3483.34 v1(6230.12,3483.34) ; IC1.14 6006.25,2580 6028.27,2602.02 6065.86,2602.02 6068.27,2604.43 6068.27,2604.63 v1(6068.5,2604.87) ; v1(6222.67,2547.82) 6225.04,2550.19 6225.04,2808.29 6247.89,2831.14 6274.5,2831.14 6299.92,2856.56 6299.92,2870.07 6308.71,2878.86 6368.86,2878.86 6375,2885 6375,2921.57 6655,3201.57 6691.57,3201.57 v1(6695,3205) ; D11.2 6695,3357.44 6702.4,3364.84 Q8.3
  Layer 2 w10: v1(6230.12,3483.34) 6571.66,3483.34 6700,3355
  Bottom Layer 1 w10: v1(6068.5,2604.87) 6068.27,2604.63 6068.27,2604.43 6072.7,2600 6075,2600 6127.18,2547.82 v1(6222.67,2547.82) ; v1(6695,3205) 6695,3355
LOWSRC_B: D10.2 IC1.17 Q7.3 R10.1 | length 2252.9
  Top Layer w10: R10.1 4485.76,3635 4755.91,3364.84 Q7.3 5706.44,3364.84 5732.62,3338.66 5794.72,3338.66 5826.06,3370 D10.2 5863.9,2813.54 5947.44,2730 IC1.17
NetC11_1: C11.1 R2.2 | length 293
  Top Layer w10: R2.2 6421.73,4095 6429.02,4102.28 C11.1
NetD9_2: D9.2 R9.2 | length 251
  Top Layer w10: R9.2 6171.23,3389.65 v1(6239.45,3389.65)
  Layer 2 w10: v1(6239.45,3389.65) 6400.95,3389.65 6406.36,3395.06
NetDS1_1: DS1.1 R8.1 | length 373.5
  Layer 2 w10: DS1.1 6132.56,3695 6147.44,3680.12 6147.44,3677.37 6194.81,3630 6435,3630
NetIC1_8: IC1.8 R6.2 | length 283.3
  Top Layer w10: R6.2 5537.36,2570 5577.36,2530 IC1.8
NetIC1_9: IC1.9 R7.2 | length 268.7
  Top Layer w10: R7.2 5552.36,2455 5577.36,2480 IC1.9
NetR15_2: R15.2 R16.2 S1.2 | length 783.3
  Top Layer w10: S1.2 3354.14,4478.11 3360,4472.25 3360,4415.86 3370.82,4405.04 R16.2 3449.96,4405.08 R15.2
pads on no net: J1.1 J1.2 J1.3 J1.4 J1.5 P2.1 P2.3 Q1.1 Q2.1 Q5.1 Q5.3 Q6.1 Q6.3 S1.M U1.1 U1.3 U1.5 U2.3 U2.4 U2.5 U2.6 U2.7 U2.8 U2.9 U2.10 U2.11 U2.12 U2.13 U2.14 U3.2